# Altium PCB memristor_measure_pcb.PcbDoc
Units mil, origin at the board's own origin, x right, y up, seen from the top; angles counter-clockwise.
Board outline 2740 x 940 mil, 2 copper layers (Top Layer, Bottom Layer); 8 components, 9 nets, 39 pads, 151 vias.
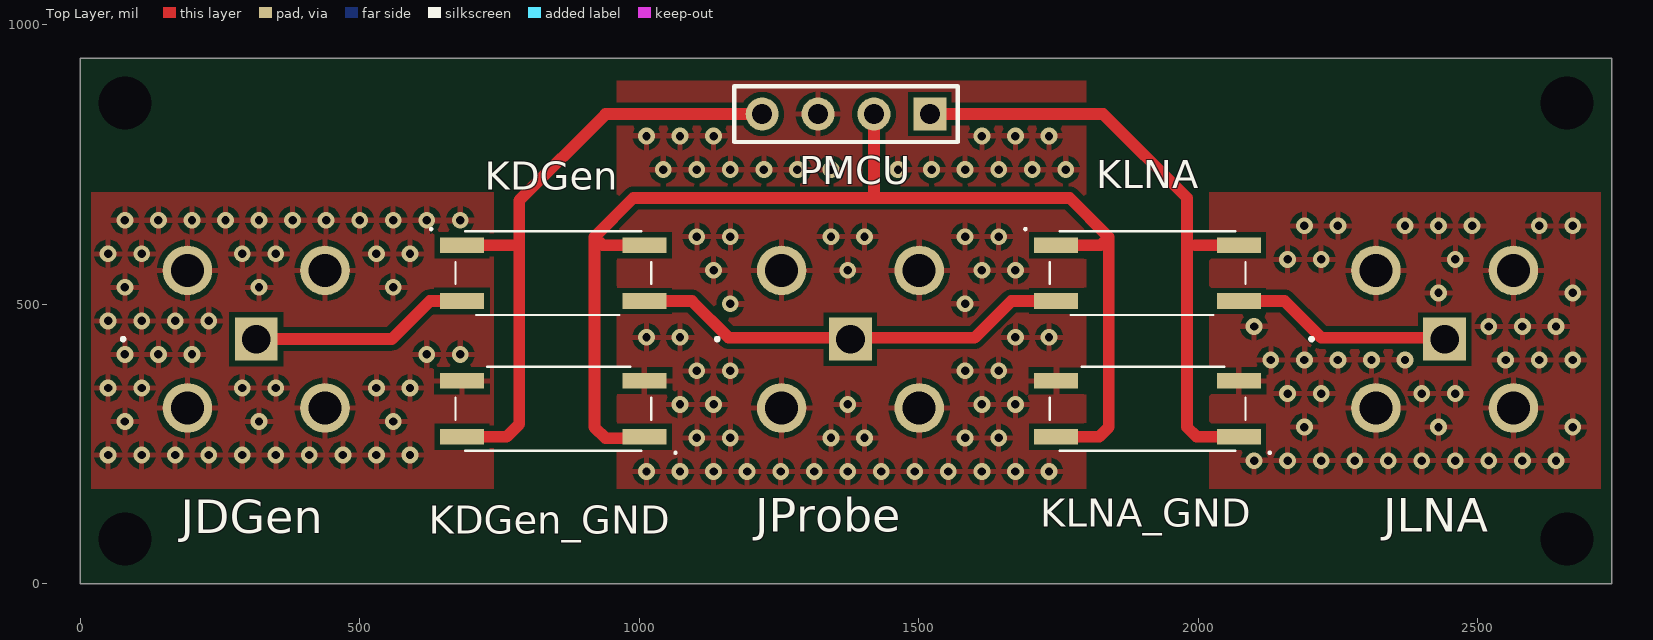
[diagram p0: Top Layer view]
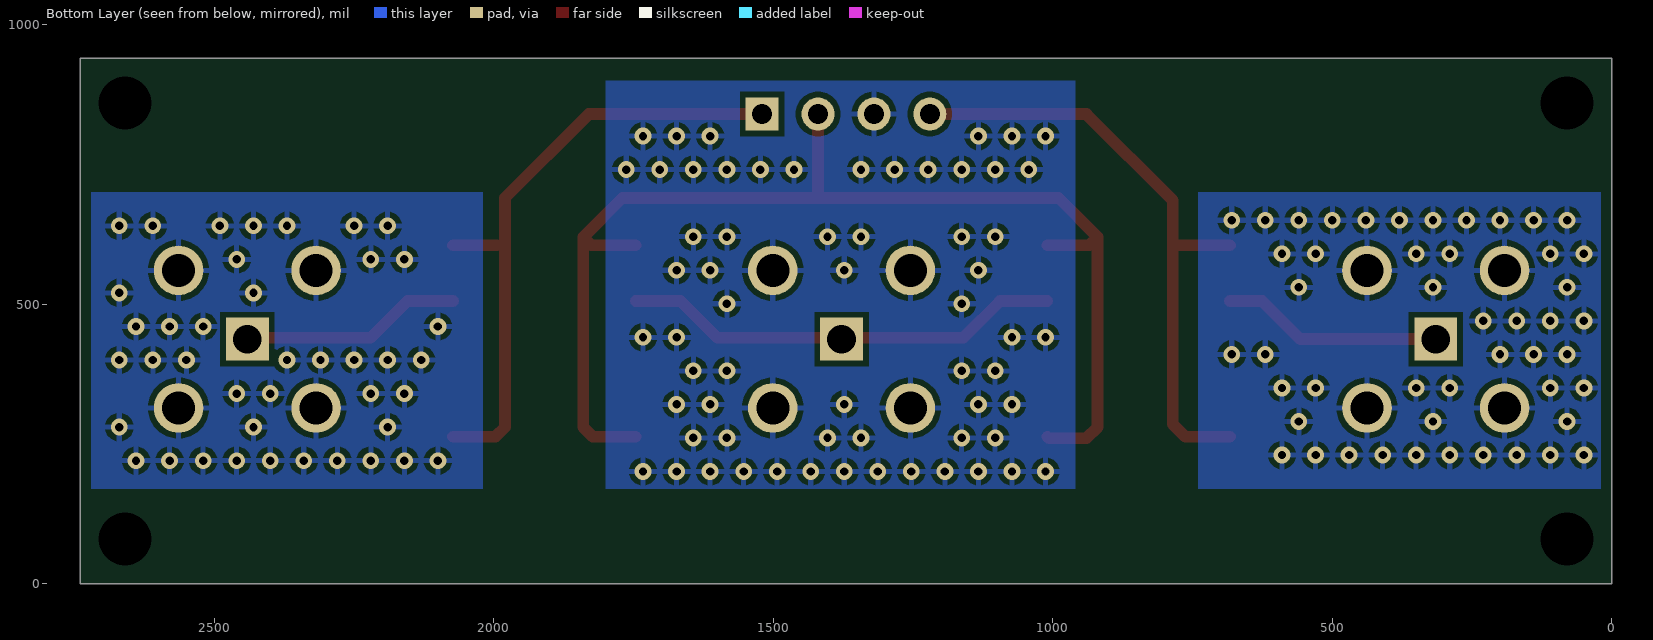
[diagram p1: Bottom Layer view, seen from below]
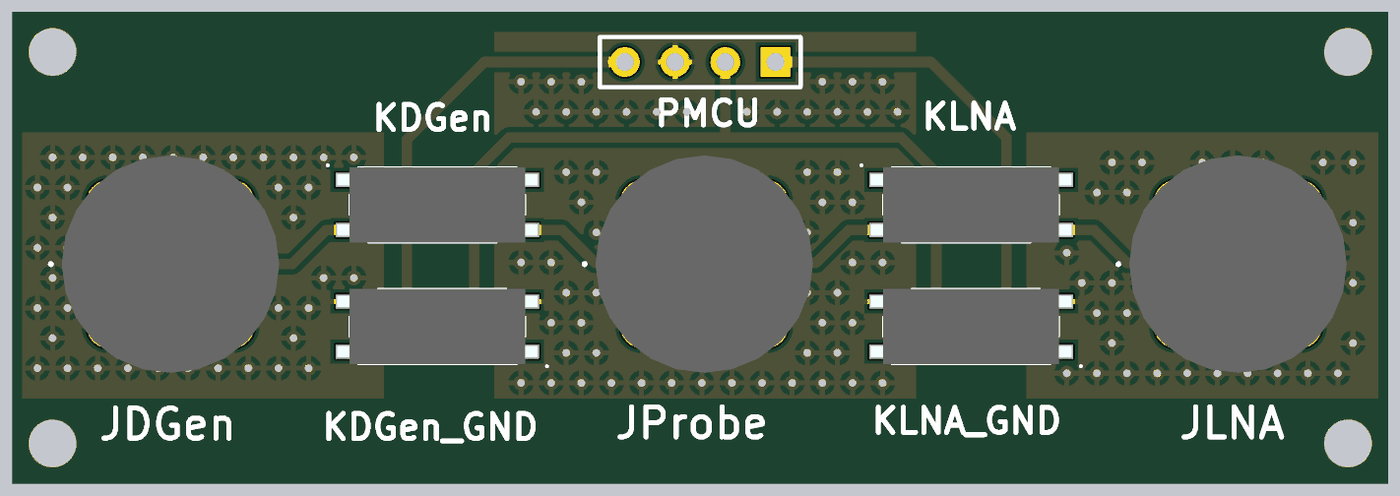
[diagram p2: 3D render of the assembled board from above, using the file's embedded part models]

## Layer stack, top to bottom
Top Solder: solder mask 0.4, Solder Resist, Dk 3.5
Top Layer: signal copper 1.4
Dielectric 1: dielectric 12.6, FR-4, Dk 4.8
Bottom Layer: signal copper 1.4
Bottom Solder: solder mask 0.4, Solder Resist, Dk 3.5

## Board outline
0,940 2740,940 2740,0 0,0

## Design rules (kind name [scope] priority, off if disabled: settings)
BoardOutlineClearance [All] p1: gap=20 ignorepadtopadclearanceinfootprint=FALSE
Clearance [All] p1: gap=10 ignorepadtopadclearanceinfootprint=FALSE except(0: Arc-Hole Track-Hole SMDPad-Hole THPad-Hole Via-Hole Fill-Hole Poly-Hole Region-Hole Text-Hole)
PolygonConnect [All] p1: connectstyle=Relief reliefconductorwidth=10 reliefentries=4 polygonreliefangle="90 Angle" airgapwidth=10
ReturnPath [All] p1: impedanceprofileid={96AB857D-EF5F-4577-80F1-8C1419B2FC1C} _gaplimit=0
RoutingVias [All] p1: holewidth=15 width=30 viastyle="Through Hole" minholewidth=15 minwidth=30 maxholewidth=15 maxwidth=30
SolderMaskExpansion [All] p1: expansion=4 istentingtop=FALSE
Width [All] p1: maxlimit=21.05 minlimit=21.05 preferedwidth=21.05 impedanceprofiledriven=TRUE impedanceprofileid={96AB857D-EF5F-4577-80F1-8C1419B2FC1C} impedanceprofilevalue=50.000000 minimp=50.000000 maximp=50.000000 favimp=50.000000
30 further rules are at their usual default settings.

## Components (designator, comment, footprint, x,y, rotation, side; value= is the part's Value field where it differs from the comment)
JDGen "VB335" VB335 314.96,437.4 r0 top
JLNA "VB335" VB335 2440.94,437.4 r0 top
JProbe "VB335" VB335 1377.95,437.4 r0 top
KDGen "9913-05-20" 99130520 846.46,555.51 r0 top
KDGen_GND "9913-05-20" 99130520 846.46,312.82 r180 top
KLNA "9913-05-20" 99130520 1909.45,555.51 r0 top
KLNA_GND "9913-05-20" 99130520 1909.45,312.82 r180 top
PMCU "Header 4" HDR1X4 1520,840 r180 top

## Footprints (in the part's own frame and the unit in brackets; to place one, negate y for a bottom-side part, rotate by r counter-clockwise, add the part's x,y. Pads: shape width x height; smd on the part's side, far side on the other; paste and mask are expansions set on the pad)
99130520 [mm]
  rect 2x0.71 smd: 1(-4.15,1.27) 2(4.15,1.27) 3(-4.15,-1.27) 4(4.15,-1.27)
  silkscreen extent -5.6,-1.91 4.44,2.05, body extent -5.08,-1.91 5.08,1.91, height 3.71
HDR1X4 [mm] "Connector; Header; 4 Position"
  rect 1.5x1.5 hole 0.9: 1(0,0)
  round 1.5 hole 0.9: 2(2.54,0) 3(5.08,0) 4(7.62,0)
  silkscreen extent -1.27,-1.27 8.89,1.27
VB335 [mm]
  rect 1.95x1.95 hole 1.3: 1(0,0)
  round 2.25 hole 1.5: 2(-3.125,-3.125) 3(3.125,-3.125) 4(3.125,3.125) 5(-3.125,3.125)
  silkscreen extent -6.1,-0.05 -6,0.05, body extent -5.5,-5.5 5.5,5.5, height 19

## Part data
JDGen JLNA JProbe: "Connector", Manufacturer_Name="Cinch Connectivity Solutions", Datasheet Link=https://belfuse.com/resources/drawings/cinchconnectivitysolutions/vitelec/dr-ccs-vit-vb335.pdf, Height=18.9mm, Manufacturer_Part_Number=VB335
KDGen KDGen_GND KLNA KLNA_GND: "Relay or Contactor", Manufacturer_Name="Coto Technology", Datasheet Link=https://cotorelay.com/wp-content/uploads/2015/02/9913Datasheet-15Jan2015.pdf, Height=3.61mm, Manufacturer_Part_Number=9913-05-20
PMCU: "Header, 4-Pin", LatestRevisionDate=17-Jul-2002, LatestRevisionNote="Re-released for DXP Platform.", Publisher="Altium Limited"

## Free pads (board coordinates)
  round 1 hole 94.49: 1(80,860) 2(2660,860) 3(2660,80) 4(80,80)

## Via types
v1: diameter 30, hole 15, Top Layer to Bottom Layer, tented both sides, 151 vias

## Nets (pads, with @x,y where several pads share a name; then routed paths per layer and width w, separated by ;. In a path a pad name is that pad's centre, name@x,y a point inside that pad or via, vN(x,y) a via of type N, cw(c..) or ccw(c..) an arc to the next point about the centre after c; other vN are vias at no path point)
DGenGND: JDGen.2 JDGen.3 JDGen.4 JDGen.5 KDGen_GND.4
  other v1: 50,230 110,230 170,230 230,230 290,230 350,230 410,230 470,230 530,230 590,230 80,290 320,290 560,290 50,350 110,350 290,350 350,350 530,350 590,350 80,410 140,410 200,410 620,410 680,410 50,470 110,470 170,470 230,470 80,530 320,530 560,530 50,590 110,590 290,590 350,590 530,590 590,590 80,650 140,650 200,650 260,650 320,650 380,650 440,650 500,650 560,650 620,650 680,650
LNAGND: JLNA.2 JLNA.3 JLNA.4 JLNA.5 KLNA_GND.3
  other v1: 2100,220 2160,220 2220,220 2280,220 2340,220 2400,220 2460,220 2520,220 2580,220 2640,220 2190,280 2430,280 2670,280 2160,340 2220,340 2400,340 2460,340 2130,400 2190,400 2250,400 2310,400 2370,400 2550,400 2610,400 2670,400 2100,460 2520,460 2580,460 2640,460 2430,520 2670,520 2160,580 2220,580 2460,580 2190,640 2250,640 2370,640 2430,640 2490,640 2610,640 2670,640
NetDGen: JDGen.1 KDGen.3 | length 396.3
  Top Layer w21.05: JDGen.1 557.4,437.4 625.51,505.51 KDGen.3
NetLNA: JLNA.1 KLNA.4 | length 396.3
  Top Layer w21.05: KLNA.4 2154.49,505.51 2220,440 2438.35,440 JLNA.1
NetMCU1: KLNA.2 KLNA_GND.1 PMCU.1 | length 1110.4
  Top Layer w21.05: PMCU.1 1830,840 1980,690 1980,280 1997.18,262.82 KLNA_GND.1 ; 1994.49,605.51 KLNA.2
NetMCU2: KDGen.1 KDGen_GND.2 PMCU.4 | length 1112.8
  Top Layer w21.05: KDGen_GND.2 762.82,262.82 785.51,285.51 785.51,605.51 ; KDGen.1 785.51,605.51 ; PMCU.4 940,840 785.51,685.51 785.51,605.51
NetMCU_GND: KDGen.2 KDGen_GND.1 KLNA.1 KLNA_GND.2 PMCU.2 | length 2206.4
  Top Layer w21.05: KDGen_GND.1 1007.02,260 940,260 920,280 920,620 ; KDGen.2 934.49,605.51 920,620 ; PMCU.2 1420,695.28 1414.53,689.81 ; KLNA_GND.2 1822.82,262.82 1840,280 1840,620 ; KLNA.1 1825.51,605.51 1840,620 ; 920,620 989.81,689.81 1414.53,689.81 ; 1414.53,689.81 1770.19,689.81 1840,620
NetProbe: JProbe.1 KDGen.4 KLNA.3 | length 792.6
  Top Layer w21.05: KDGen.4 1094.49,505.51 1160,440 1375.35,440 JProbe.1 1380.55,440 1600,440 1665.51,505.51 KLNA.3
ProbeGND: JProbe.2 JProbe.3 JProbe.4 JProbe.5 KDGen_GND.3 KLNA_GND.4 PMCU.3
  other v1: 1013.11,200.63 1073.11,200.63 1133.11,200.63 1193.11,200.63 1253.11,200.63 1313.11,200.63 1373.11,200.63 1433.11,200.63 1493.11,200.63 1553.11,200.63 1613.11,200.63 1673.11,200.63 1733.11,200.63 1103.11,260.63 1163.11,260.63 1343.11,260.63 1403.11,260.63 1583.11,260.63 1643.11,260.63 1073.11,320.63 1133.11,320.63 1373.11,320.63 1613.11,320.63 1673.11,320.63 1103.11,380.63 1163.11,380.63 1583.11,380.63 1643.11,380.63 1013.11,440.63 1073.11,440.63 1673.11,440.63 1733.11,440.63 1163.11,500.63 1583.11,500.63 1133.11,560.63 1373.11,560.63 1613.11,560.63 1673.11,560.63 1103.11,620.63 1163.11,620.63 1343.11,620.63 1403.11,620.63 1583.11,620.63 1643.11,620.63 1043.11,740.63 1103.11,740.63 1163.11,740.63 1223.11,740.63 1283.11,740.63 1343.11,740.63 1463.11,740.63 1523.11,740.63 1583.11,740.63 1643.11,740.63 1703.11,740.63 1763.11,740.63 1013.11,800.63 1073.11,800.63 1133.11,800.63 1613.11,800.63 1673.11,800.63 1733.11,800.63

## Polygon pours and split planes (outlines as drawn)
ProbeGND on Top Layer "PROBEGND_L01_P004" (solid, pour order 4): 960,900 960,170 1800,170 1800,900
DGenGND on Top Layer "DGENGND_L01_P002" (solid, pour order 2): 20,170 740,170 740,700 20,700
LNAGND on Top Layer "LNAGND_L01_P006" (solid, pour order 6): 2020,700 2020,170 2720,170 2720,700
ProbeGND on Bottom Layer "PROBEGND_L02_P005" (solid, pour order 5): 960,900 1800,900 1800,170 960,170
DGenGND on Bottom Layer "DGENGND_L02_P003" (solid, pour order 3): 740,700 740,170 20,170 20,700
LNAGND on Bottom Layer "LNAGND_L02_P007" (solid, pour order 7): 2020,700 2020,170 2720,170 2720,700